# Altium PCB Etherent test.PcbDoc
Units mil, origin at the board's own origin, x right, y up, seen from the top; angles counter-clockwise.
Board outline 6000 x 4000 mil, 2 copper layers (Top Layer, Bottom Layer); 42 components, 34 nets, 165 pads, 36 vias.
Unrouted connection lines stored in the file: 5.
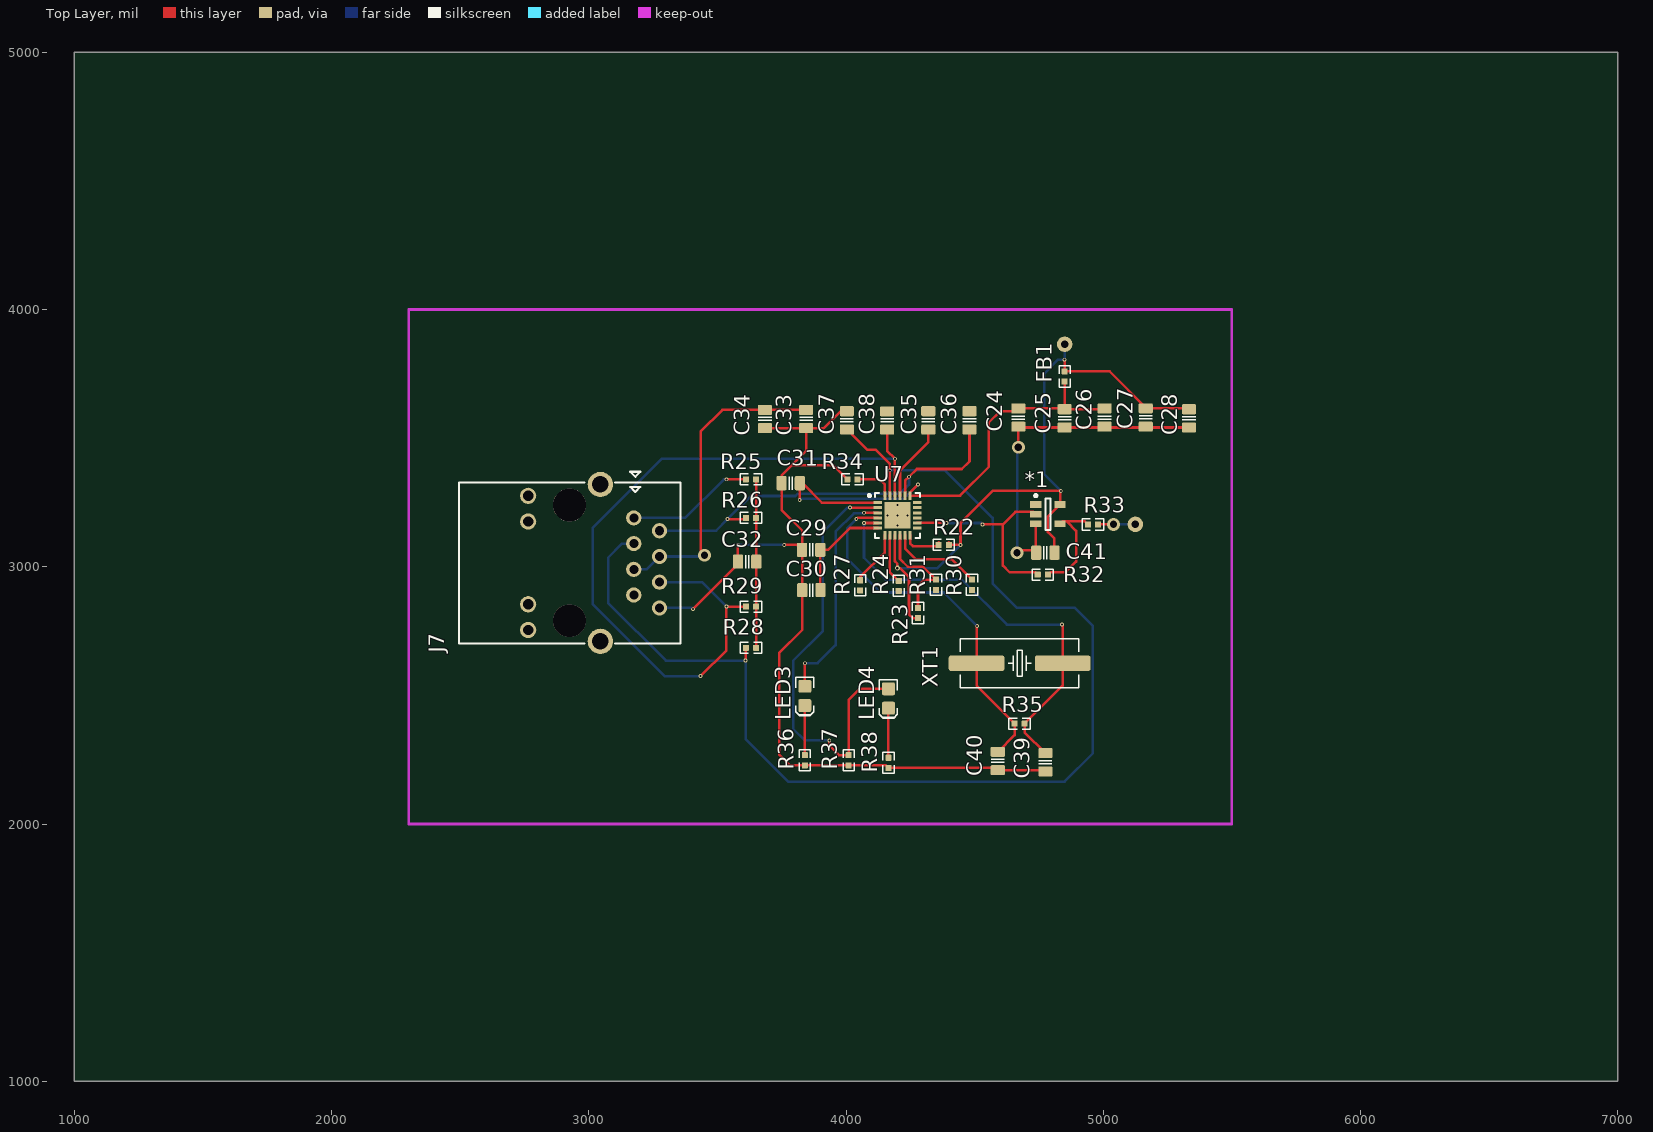
[diagram p0: Top Layer view]
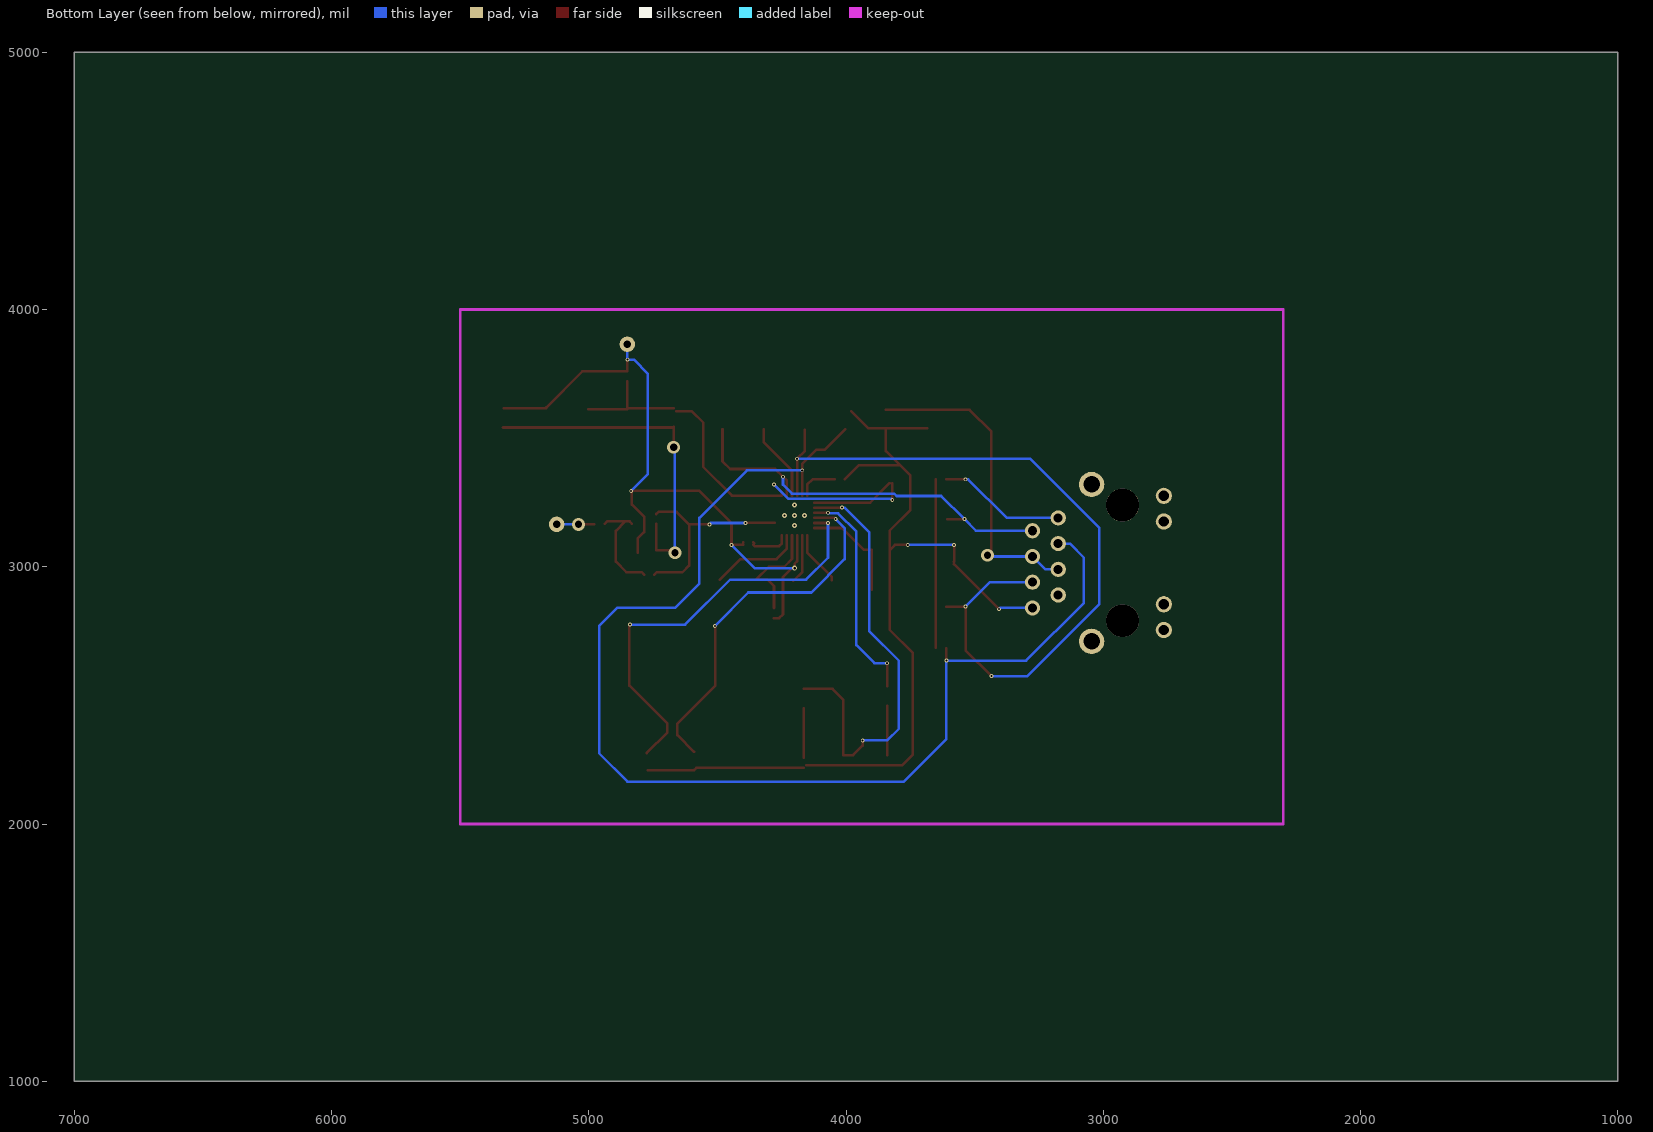
[diagram p1: Bottom Layer view, seen from below]
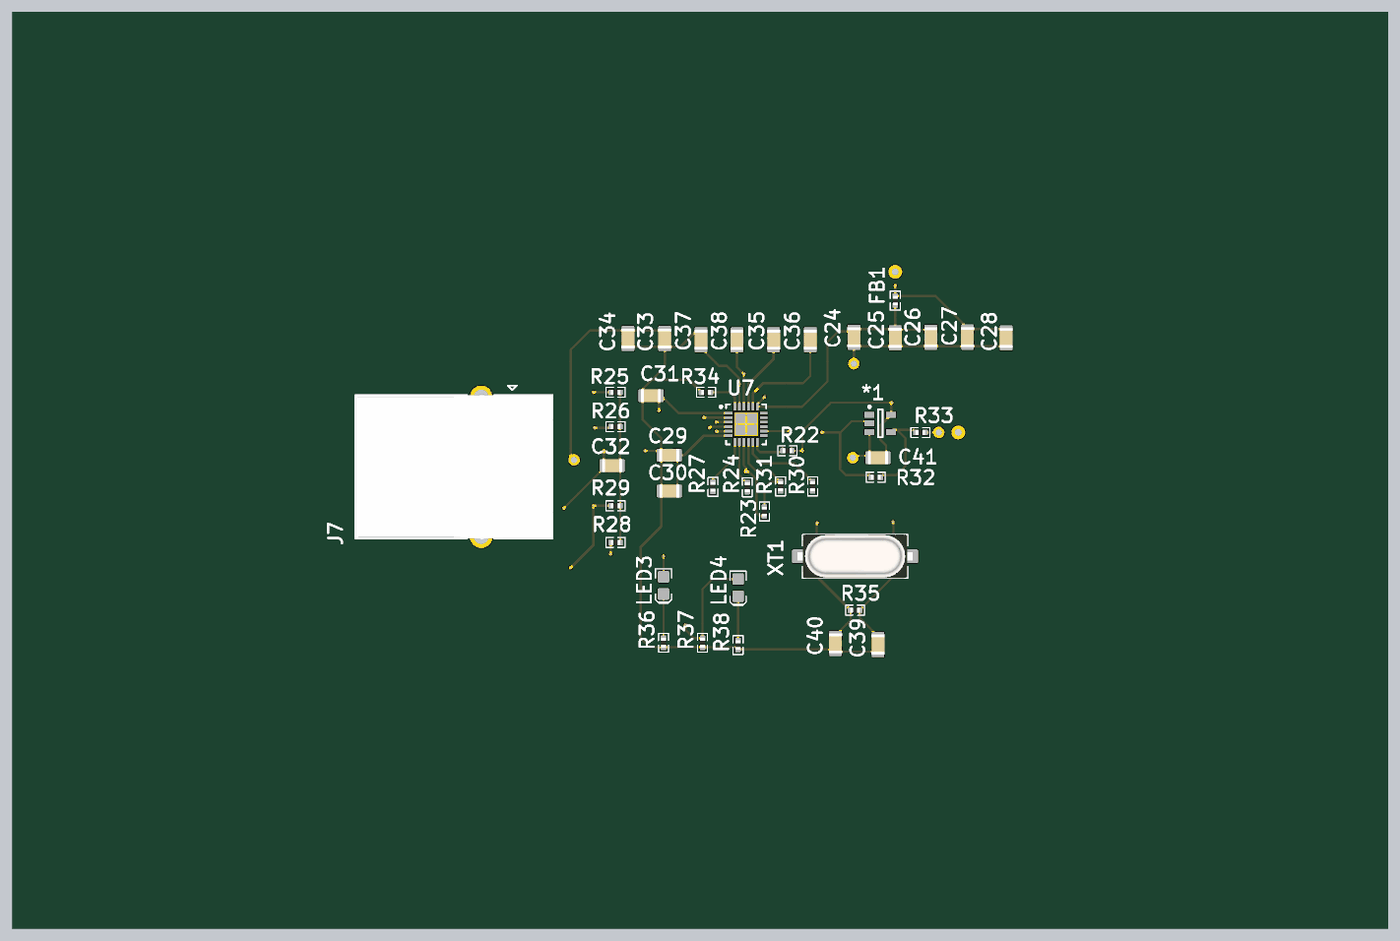
[diagram p2: 3D render of the assembled board from above, using the file's embedded part models]

## Layer stack, top to bottom
Top Layer: signal copper 1.4
Dielectric: dielectric 12.6, FR-4, Dk 4.8
Bottom Layer: signal copper 1.4

## Board outline
1000,1000 7000,1000 7000,5000 1000,5000

## Design rules (kind name [scope] priority, off if disabled: settings)
Clearance [All] p1: gap=10
PolygonConnect [All] p1: connectstyle=Relief reliefconductorwidth=10 reliefentries=4 polygonreliefangle="90 Angle"
RoutingVias [All] p1: holewidth=28 width=50 viastyle="Through Hole" minholewidth=28 minwidth=50 maxholewidth=28 maxwidth=50
SilkscreenOverComponentPads [All] p1: minsilkscreentomaskgap=10
SolderMaskExpansion [All] p1: expansion=4
Width [All] p1: maxlimit=10 minlimit=10 preferedwidth=10
27 further rules are at their usual default settings.

## Components (designator, comment, footprint, x,y, rotation, side; value= is the part's Value field where it differs from the comment)
*1 "74LVC1G04GW" SOT-23-CT5_N 4785,3204.57 r0 top
C24 "approved sub OK" CAPC2012N 4670,3580 r90 top
C25 "approved sub OK" CAPC2012N 4850,3577.13 r90 top
C26 "approved sub OK" CAPC2012N 5005,3580 r90 top
C27 "approved sub OK" CAPC2012N 5165,3580.43 r90 top
C28 "approved sub OK" CAPC2012N 5333.5,3576.81 r90 top
C29 "approved sub OK" CAPC2012N 3864.57,3065.75 r0 top
C30 "approved sub OK" CAPC2012N 3865.31,2909.25 r0 top
C31 "approved sub OK" CAPC2012N 3785,3325 r0 top
C32 "approved sub OK" CAPC2012N 3615.75,3020 r0 top
C33 "approved sub OK" CAPC2012N 3845,3574.57 r90 top
C34 "approved sub OK" CAPC2012N 3685,3574.57 r90 top
C35 "approved sub OK" CAPC2012N 4320,3569.25 r270 top
C36 "approved sub OK" CAPC2012N 4480,3569.25 r270 top
C37 "approved sub OK" CAPC2012N 4003.5,3569.25 r270 top
C38 "approved sub OK" CAPC2012N 4160,3568.82 r270 top
C39 "approved sub OK" CAPC2012N 4775,2240 r90 top
C40 "approved sub OK" CAPC2012N 4590,2245 r90 top
C41 "approved sub OK" CAPC2012N 4775,3054.57 r0 top
FB1 "Thick Film" RESC1005N 4850,3740 r270 top
J7 "#NAME?" "WE-RJ45 LAN" 2925,3015 r90 top
LED3 "Red" LED-0805-A 3840,2497.87 r270 top
LED4 "Red" LED-0805-A 4165,2487.87 r270 top
R22 "Thick Film" RESC1005N 4380,3085 r180 top
R23 "Thick Film" RESC1005N 4280,2820 r90 top
R24 "Thick Film" RESC1005N 4205,2925.75 r90 top
R25 "Thick Film" RESC1005N 3630.75,3340 r180 top
R26 "Thick Film" RESC1005N 3630.75,3190 r180 top
R27 "Thick Film" RESC1005N 4055,2927.87 r90 top
R28 "Thick Film" RESC1005N 3630.75,2685 r180 top
R29 "Thick Film" RESC1005N 3630.75,2845 r180 top
R30 "Thick Film" RESC1005N 4490,2930 r90 top
R31 "Thick Film" RESC1005N 4350,2930 r90 top
R32 "Thick Film" RESC1005N 4765,2969.57 r0 top
R33 "Thick Film" RESC1005N 4960,3164.57 r180 top
R34 "Thick Film" RESC1005N 4025,3340 r180 top
R35 "Thick Film" RESC1005N 4675,2390 r180 top
R36 "Thick Film" RESC1005N 3840,2247.87 r90 top
R37 "Thick Film" RESC1005N 4010,2247.87 r90 top
R38 "Thick Film" RESC1005N 4165,2237.87 r90 top
U7 "LAN8720A-CP" QFN-MJ24 4200,3200 r0 top
XT1 "25MHz" CRYSTAL_HC49-US-SM 4675,2625 r180 top

## Footprints (in the part's own frame and the unit in brackets; to place one, negate y for a bottom-side part, rotate by r counter-clockwise, add the part's x,y. Pads: shape width x height; smd on the part's side, far side on the other; paste and mask are expansions set on the pad)
CAPC2012N [mm] "Chip Capacitor, Body 2.0x1.2mm, 0805, IPC Medium Density"
  round 0.254 on Mech14: 0(0,0)
  rrect25% 1x1.4 smd: 1(-0.9,0) 2(0.9,0)
  Top Layer pour cut-out: -0.4,0.8 0.4,0.8 0.4,-0.8 -0.4,-0.8
  silkscreen extent -0.15,-0.65 0.15,0.65, body extent -1.1,-0.72 1.1,0.73, height 1.34
CRYSTAL_HC49-US-SM [mm] "SMD Crystal HC49/US-SM package"
  round 0.508 on Mech14: 0(0,0)
  rrect25% 5.5x1.5 smd: 1(-4.25,0) 2(4.25,0)
  silkscreen extent -5.84,-2.41 5.84,2.41, body extent -6.4,-2.41 6.4,2.42, height 4.29
LED-0805-A [mil]
  round 20 on Mech14: 0(0,0)
  rrect25% 50x50 smd: A(-37.5,0) K(37.5,0)
  Top Layer pour cut-out: -15,30 15,30 15,-30 -15,-30
  silkscreen extent -72,-35 77,35, body extent -39,-25 39,25, height 31
QFN-MJ24 [mm] "QFN, 24-Leads, Body 4x4mm, Pitch 0.5mm, Microchip Recommended"
  rect 0.85x0.3 smd: 1(-1.95,1.25) 2(-1.95,0.75) 3(-1.95,0.25) 4(-1.95,-0.25) 5(-1.95,-0.75) 6(-1.95,-1.25) 13(1.95,-1.25) 14(1.95,-0.75) 15(1.95,-0.25) 16(1.95,0.25) 17(1.95,0.75) 18(1.95,1.25)
  rect 0.3x0.85 smd: 7(-1.25,-1.95) 8(-0.75,-1.95) 9(-0.25,-1.95) 10(0.25,-1.95) 11(0.75,-1.95) 12(1.25,-1.95) 19(1.25,1.95) 20(0.75,1.95) 21(0.25,1.95) 22(-0.25,1.95) 23(-0.75,1.95) 24(-1.25,1.95)
  rect 2.6x2.6 smd paste-1.3: 25(0,0)
  silkscreen extent -2.9,-2.22 2.22,2.22, body extent -2.07,-2.07 2.07,2.07, height 0.9
RESC1005N [mm] "Chip Resistor, Body 1.0x0.5mm, EIA 0402, IPC Medium Density"
  round 0.2 on Mech14: 0(0,0)
  rrect20% 0.6x0.6 smd: 1(-0.5,0) 2(0.5,0)
  Top Layer pour cut-out: -0.2,0.35 0.2,0.35 0.2,-0.35 -0.2,-0.35
  silkscreen extent -1.05,-0.55 1.05,0.55, body extent -0.52,-0.27 0.53,0.28, height 0.4
SOT-23-CT5_N [mm] "SOT23, 5-Leads, Body 2.9x1.6mm, Pitch 0.95mm, Lead Span 2.7mm, IPC Medium Density"
  rect 1.1x0.65 smd: 1(-1.2,0.95) 2(-1.2,0) 3(-1.2,-0.95) 4(1.2,-0.95) 5(1.2,0.95)
  silkscreen extent -1.32,-1.55 0.25,1.95, body extent -0.9,-1.55 0.9,1.55, height 1.45
"WE-RJ45 LAN" [mm] "RJ45 LAN CONNECTOR with Surge Protection,  THT, Body 16.04 X 21.30 mm"
  round 1.5 hole 0.89 paste+0: 1(4.445,-6.35) 2(3.175,-8.89) 3(1.905,-6.35) 4(0.635,-8.89) 5(-0.635,-6.35) 6(-1.905,-8.89) 7(-3.175,-6.35) 8(-4.445,-8.89)
  round 1.6 hole 1.02 paste+0: 9(6.625,4.08) 10(4.085,4.08) 11(-4.085,4.08) 12(-6.625,4.08)
  round 3.25 hole 3.25 paste+0: 13(-5.715,0) 14(5.715,0)
  round 2.5 hole 1.63 paste+0: 15(-7.745,-3.05) 16(7.745,-3.05)
  silkscreen extent -7.94,-10.95 9,10.89, body extent -8.04,-11.02 8.04,10.82, height 14.37

## Part data
C24 C25 C26 C27 C28 C29 C30 C31 C32 C33 C34 C35 C36 C37 C38 C39 C40 C41: library part CAPC_100n_0805, "Capacitor SMD Cer 100nF 10% 50V X7R 0805"
FB1 R22 R23 R24 R25 R26 R27 R28 R29 R30 R31 R32 R33 R34 R35 R36 R37 R38: library part RES_330R_0402_5%, "Resistor SMD chip 330 Ohm 0.063W 5% 0402"
J7: library part "WE-RJ45,  7499010441", "LAN Transformer WE-RJ45, with Surge Protection"
LED3 LED4: library part LED_SMD_Red_0805, "LED, 0805 SMD, Red"
XT1: library part Crystal_6MHz_HC49/US, "Resonator Ceramic 6.00 MHz 30ppm"

## Free pads (board coordinates)
  round 60 hole 30: 0(4850,3865) 1(5125,3165)

## Via types
v1: diameter 15, hole 8, Top Layer to Bottom Layer, 26 vias
v2: diameter 19.68, hole 7.87, Top Layer to Bottom Layer, tented top, 5 vias
v3: diameter 50, hole 28, Top Layer to Bottom Layer, 4 vias
v4: diameter 20, hole 10, Top Layer to Bottom Layer, 1 vias

## Nets (pads, with @x,y where several pads share a name; then routed paths per layer and width w, separated by ;. In a path a pad name is that pad's centre, name@x,y a point inside that pad or via, vN(x,y) a via of type N, cw(c..) or ccw(c..) an arc to the next point about the centre after c; other vN are vias at no path point)
+3V3: C33.2 C34.2 J7.4 J7.5 | length 1222.1
  Top Layer w10: v3(3450,3045) 3435,3060 3435,3525 3520,3610 C34.2 C33.2
  Bottom Layer w10: J7.5 3225,2990 J7.4 v3@3445,3040
ENET-CRS: R30.1
ENET-MDC: U7.13
ENET-MDIO: R22.2 U7.12 | length 156
  Top Layer w10: U7.12 4249.21,3090.79 4260,3080 4355.31,3080 R22.2 ; R22.2@4356.1,3090.79 R22.2@4360.31,3095
ENET-REF_CLK: pad.1 R33.1 | length 145.5
  Top Layer w10: R33.1 5039.57,3164.57 v3(5040,3165)
  Bottom Layer w10: v3(5040,3165) pad.1
ENET-RX_ER: R31.1
ENET-RXD0: R24.1
ENET-RXD1: R27.1
ENET-TX_EN: U7.16
ENET-TXD0: U7.17
ENET-TXD1: U7.18
GND: *1.3 C24.1 C25.1 C26.1 C27.1 C28.1 C29.1 C30.1 C31.1 C32.1 C33.1 C34.1 C35.1 C36.1 C37.1 C38.1 C39.1 C40.1 C41.1 J7.8 R34.2 R36.1 R37.1 R38.1 | length 4999
  Top Layer w10: v1(3405,2835) C32.1@3580.31,3010.31 ; v1(3580,3085) 3580,3020.31 C32.1 ; C34.1 C33.1 ; v1(3760,3085) 3809.88,3085 C29.1 3829.13,3139.37 ; C29.1@3829.88,3065 C30.1 3829.88,2754.88 3740,2665 3740,2270 3781.81,2228.19 R36.1 R37.1 R38.1@4155,2228.19 ; 3829.88,3140.12 3749.57,3220.43 C31.1 3749.57,3354.57 3790,3395 ; C37.1@3979.69,3604.69 3914.13,3539.13 C33.1 ; R34.2 3950.32,3395 3790,3395 ; R38.1 4581.38,2218.19 C40.1 C39.1@4770,2209.57 ; v3(4665,3054.57) 4674.06,3063.63 4737.76,3063.63 *1.3 ; v3(4670,3464.57) C24.1 ; C24.1@4673.19,3541.38 5005,3541.38 C28.1 ; 3790,3395 3845,3450 C33.1
  Bottom Layer w10: J7.8 v1@3400,2840 ; v1(3580,3085) v1(3760,3085) ; v3(4665,3054.57) v3@4665,3459.57
NetC24_2: C24.2 C25.2 C26.2 C31.2 FB1.2 U7.1 U7.19 | length 2010.8
  Top Layer w10: v1(3820,3260) C31.2@3820,3324.57 ; C31.2@3830,3325 3905.79,3249.21 U7.1 ; U7.19 U7.19@4249.21,3289.21 ; U7.19@4250.43,3276.77 4443.23,3276.77 4555,3388.54 4555,3560 4600,3605 C24.2@4659.57,3605 ; U7.19@4250.43,3290.43 v1(4280,3320) ; C24.2 C25.2@4847.13,3615.43 ; FB1.2 C25.2 C26.2@5002.13,3612.56
  Bottom Layer w10: v1(3820,3260) 3824.21,3264.21 4224.21,3264.21 v1(4280,3320)
NetC29_2: C29.2 C30.2 U7.6 | length 414.2
  Top Layer w10: C30.2@3900,2910 C29.2 3930.75,3065.75 4015.79,3150.79 U7.6
NetC32_2: C32.2 R25.1 R26.1 R28.1 R29.1 | length 653.5
  Top Layer w10: C32.2@3650.43,3020.75 R26.1 R25.1 ; R28.1@3651.18,2685.75 C32.2
NetC35_2: C35.2 J7.1 R25.2 U7.21 | length 790.7
  Top Layer w10: v1(3535,3340) R25.2 ; 4209.53,3374.53 4320,3485 C35.2 ; U7.21 4209.84,3374.21
  Bottom Layer w10: J7.1 3375,3190 3525,3340
NetC36_2: C36.2 J7.2 R26.2 U7.20 | length 1604.6
  Top Layer w10: v1(3540,3185) R26.2@3606.06,3185 ; U7.20 4229.53,3334.53 4229.84,3334.53 4245,3349.68 v1(4245,3350) 4245.31,3350 4275.31,3380 4450,3380 4480,3410 C36.2
  Bottom Layer w10: J7.2 3495,3140 v1(3540,3185) 3630,3275 3803.18,3275 3812.39,3284.21 4210,3284.21 4245,3319.21 v1(4245,3350)
NetC37_2: C37.2 J7.3 R28.2 U7.23 | length 4774.5
  Top Layer w10: v1(3610,2635) R28.2@3610,2683.94 ; C37.2 4082.32,3455 4115,3455 4170.16,3399.84 4170.16,3375.16 v1(4170,3375) 4170.79,3374.21 4170.79,3301.25 4170.47,3300.94 U7.23
  Bottom Layer w10: J7.3 3130,3090 3075,3035 3075,2860 3300,2635 v1(3610,2635) 3610,2330 3775,2165 4850,2165 4960,2275 4960,2770 4890,2840 4665,2840 4570,2935 4570,3190 4385,3375 v1(4170,3375)
NetC38_2: C38.2 J7.6 R29.2 U7.22 | length 3073.8
  Top Layer w10: v1(3435,2575) 3535,2675 v1(3535,2845) R29.2 ; C38.2 4160,3450 v1(4190,3420) 4190.16,3419.84 U7.22
  Bottom Layer w10: J7.6 3440,2940 v1(3535,2845) ; v1(3435,2575) 3295,2575 3015,2855 3015,3150 3285,3420 v1(4190,3420)
NetC39_2: C39.2 R35.1 U7.5 XT1.1 | length 1657.1
  Top Layer w10: v1(4070,3170) U7.5@4122.76,3170 ; C39.2 4694.69,2355.75 R35.1 4842.32,2537.64 XT1.1 v1@4842.32,2772.68
  Bottom Layer w10: v1(4070,3170) 4070,3035 4155,2950 4450,2950 4625,2775 v1(4840,2775)
NetC40_2: C40.2 R35.2 U7.4 XT1.2 | length 1435.7
  Top Layer w10: v1@4045.16,3190.16 U7.4 ; v1@4507.68,2767.68 XT1.2 4507.68,2537.64 R35.2 4655.31,2345.75 C40.2
  Bottom Layer w10: v1(4040,3185) 4005,3150 4005,3030 4135,2900 4380,2900 v1(4510,2770)
NetLED3_A: LED3.A U7.3 | length 873.8
  Top Layer w10: LED3.A v1(3840,2625) ; v1@4070.16,3209.84 U7.3
  Bottom Layer w10: v1(3840,2625) 3890,2625 3960,2695 3960,3136.82 4030.68,3207.5 4067.5,3207.5 v1(4070,3210)
NetLED3_K: LED3.K R36.2 | length 192.8
  Top Layer w10: R36.2 LED3.K
NetLED4_A: LED4.A R37.2 U7.2 | length 1721.8
  Top Layer w10: v1(3935,2325) 3935,2305 3972.44,2267.56 R37.2 4010,2482.87 4052.5,2525.37 LED4.A ; v1@4015.47,3229.53 U7.2
  Bottom Layer w10: v1(3935,2325) 3840,2325 3795,2370 3795,2635 3910,2750 3910,3135 4005,3230 v1(4015,3230)
NetLED4_K: LED4.K R38.2 | length 192.8
  Top Layer w10: R38.2 LED4.K
NetR23_2: R23.2 R31.2 U7.10 | length 431.7
  Top Layer w10: U7.10 4209.84,3055.16 ; 4210,3055 4209.84,3055.16 ; R23.2 4280,2925 ; 4280.63,2925 4305.31,2949.68 R31.2 4299.69,3000 4240,3000 4209.84,3030.16 4209.84,3055.16
NetR24_2: R24.2 U7.8 | length 193.4
  Top Layer w10: U7.8 4170.47,3024.53 4170,3025 4170,2980.43 R24.2
NetR27_2: R27.2 U7.7 | length 215.3
  Top Layer w10: R27.2 4055,2960 4150.79,3055.79 U7.7
NetR30_2: R30.2 U7.11 | length 363.3
  Top Layer w10: U7.11 4229.53,3070.47 4270,3030 4409.69,3030 R30.2
NetR32_2: *1.4 R32.2 R33.2 | length 415.9
  Top Layer w10: R32.2 4793.75,2978.63 4854.06,2978.63 4895,3019.57 4895,3139.57 4858.34,3176.23 ; *1.4 4841.31,3176.23 4858.34,3176.23 ; R33.2@4937.72,3167.17 4928.65,3176.23 4858.34,3176.23
NetR34_1: R34.1 U7.24 | length 157.2
  Top Layer w10: R34.1 4130,3340 4150.79,3319.21 U7.24
RFFCLKO: *1.2 R32.1 U7.14 | length 797.3
  Top Layer w10: U7.14 4389.53,3170.47 v1(4390,3170) ; v1(4530,3165) 4609.57,3165 4610,3164.57 ; *1.2 4728.69,3213.63 4659.06,3213.63 4610,3164.57 ; R32.1 4736.25,2978.63 4635.94,2978.63 4610,3004.57 4610,3164.57
  Bottom Layer w10: v1(4390,3170) 4525,3170 v1(4530,3165)
RSTOUT_N: U7.15
VIO_3V3X: *1.5 C27.2 C28.2 C41.2 FB1.1 pad.0 R22.1 R23.1 U7.9 | length 2731
  Top Layer w10: 4190.16,3021.56 U7.9 ; 4190.47,3021.24 4200,3011.72 v4(4200,2995) 4210,2995 4245,2960 4245,2815 4259.69,2800.32 R23.1 ; R22.1 v1(4445,3085) 4445,3170 4570,3295 4829.49,3295 v1@4832.24,3292.24 ; R22.1@4399.69,3093.03 R22.1@4399.69,3095 ; C41.2@4810,3055 4810,3109.57 4785,3134.57 4785,3194.72 *1.5 v1@4832.24,3292.24 ; v1(4835,3295) v1@4832.24,3292.24 ; v1(4850,3805) FB1.1 5025.31,3759.68 C27.2@5165,3620 ; C27.2 C28.2@5329.88,3615.87
  Bottom Layer w10: v4(4200,2995) 4355,2995 v1(4445,3085) ; v1(4835,3295) 4770,3360 4770,3750 4825,3805 v1(4850,3805) pad.0
pads on no net: *1.1 C24.0 C25.0 C26.0 C27.0 C28.0 C29.0 C30.0 C31.0 C32.0 C33.0 C34.0 C35.0 C36.0 C37.0 C38.0 C39.0 C40.0 C41.0 FB1.0 J7.7 J7.9 J7.10 J7.11 J7.12 J7.13 J7.14 J7.15 J7.16 LED3.0 LED4.0 R22.0 R23.0 R24.0 R25.0 R26.0 R27.0 R28.0 R29.0 R30.0 R31.0 R32.0 R33.0 R34.0 R35.0 R36.0 R37.0 R38.0 U7.25 XT1.0
copper on no net:
  other v2: 4200,3160.63 4160.63,3200 4200,3200 4239.37,3200 4200,3239.37

## Keep-outs
Keep-Out Layer:
  lines w10: 2300,2000 2300,4000 5500,4000 5500,2000 2300,2000